# Altium PCB PCB1.PcbDoc
Units mil, origin at the board's own origin, x right, y up, seen from the top; angles counter-clockwise.
Board outline 6000 x 4000 mil, 2 copper layers (Top Layer, Bottom Layer); 62 components, 88 nets, 368 pads, 55 vias.
Unrouted connection lines stored in the file: 5.
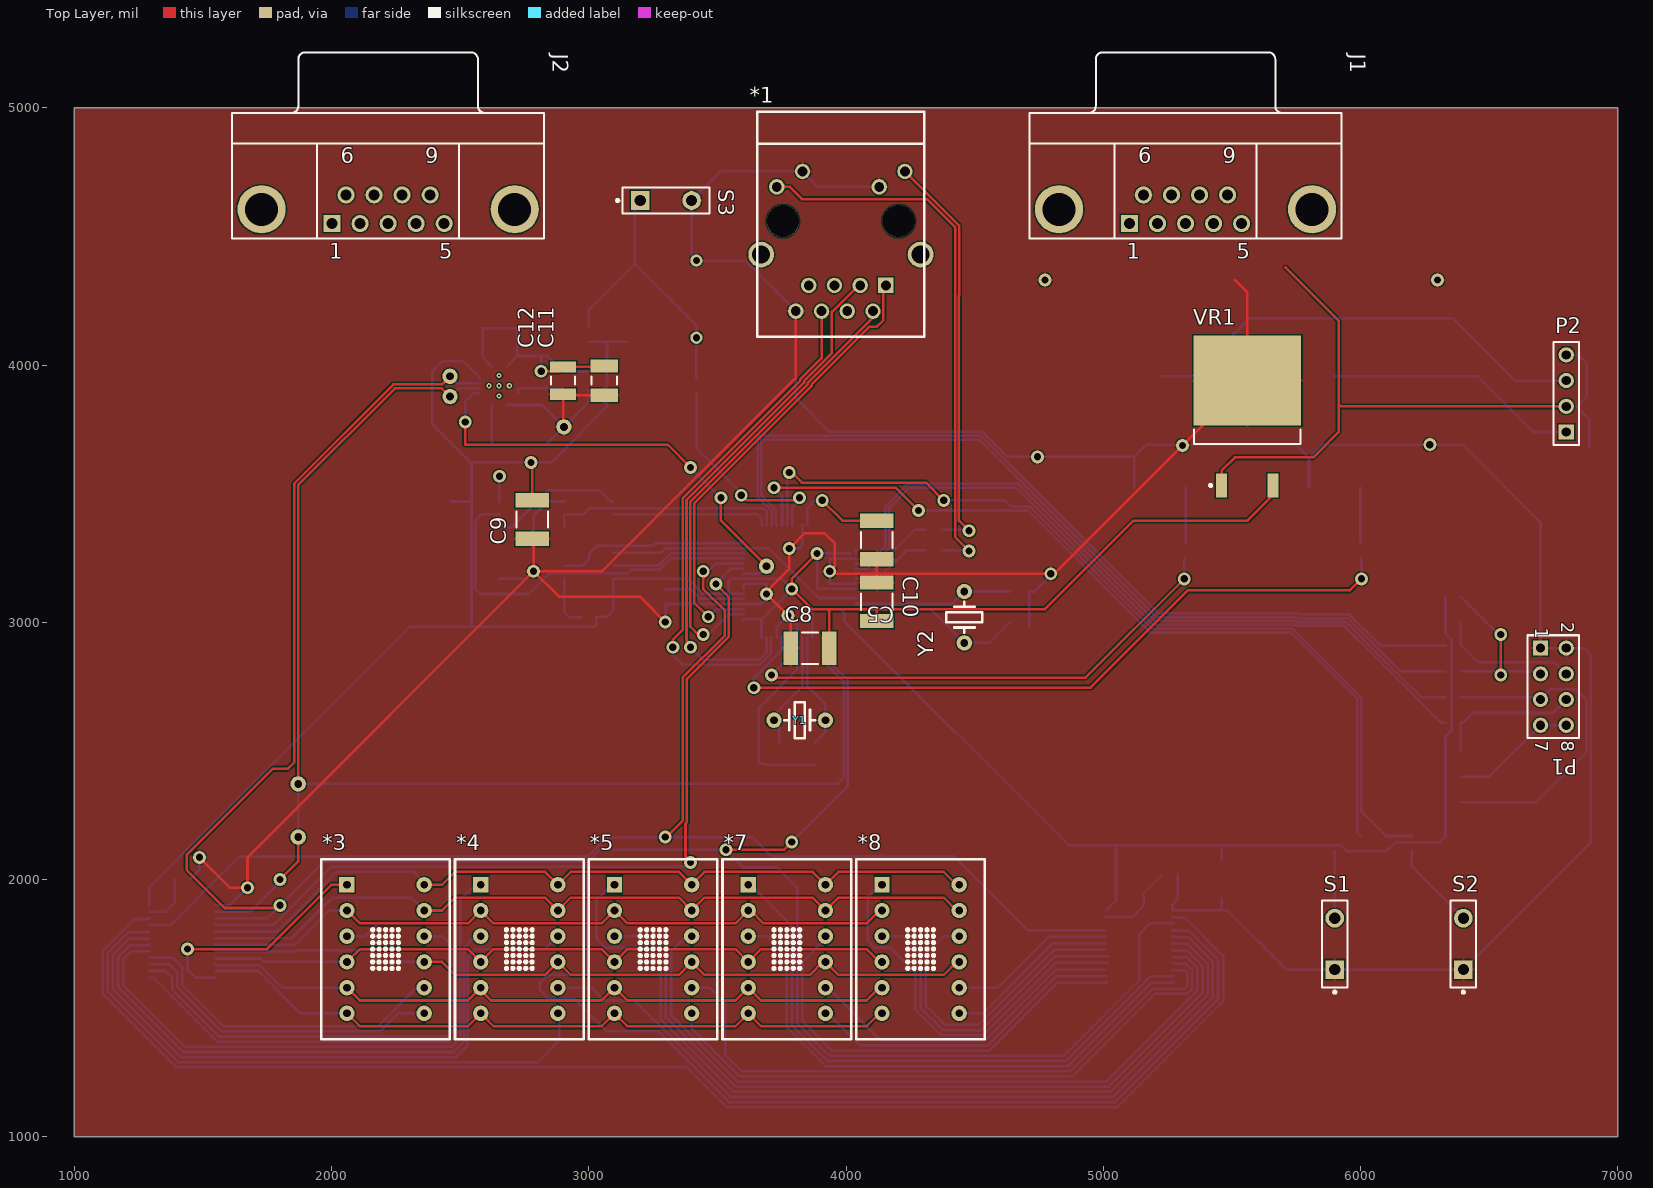
[diagram p0: Top Layer view]
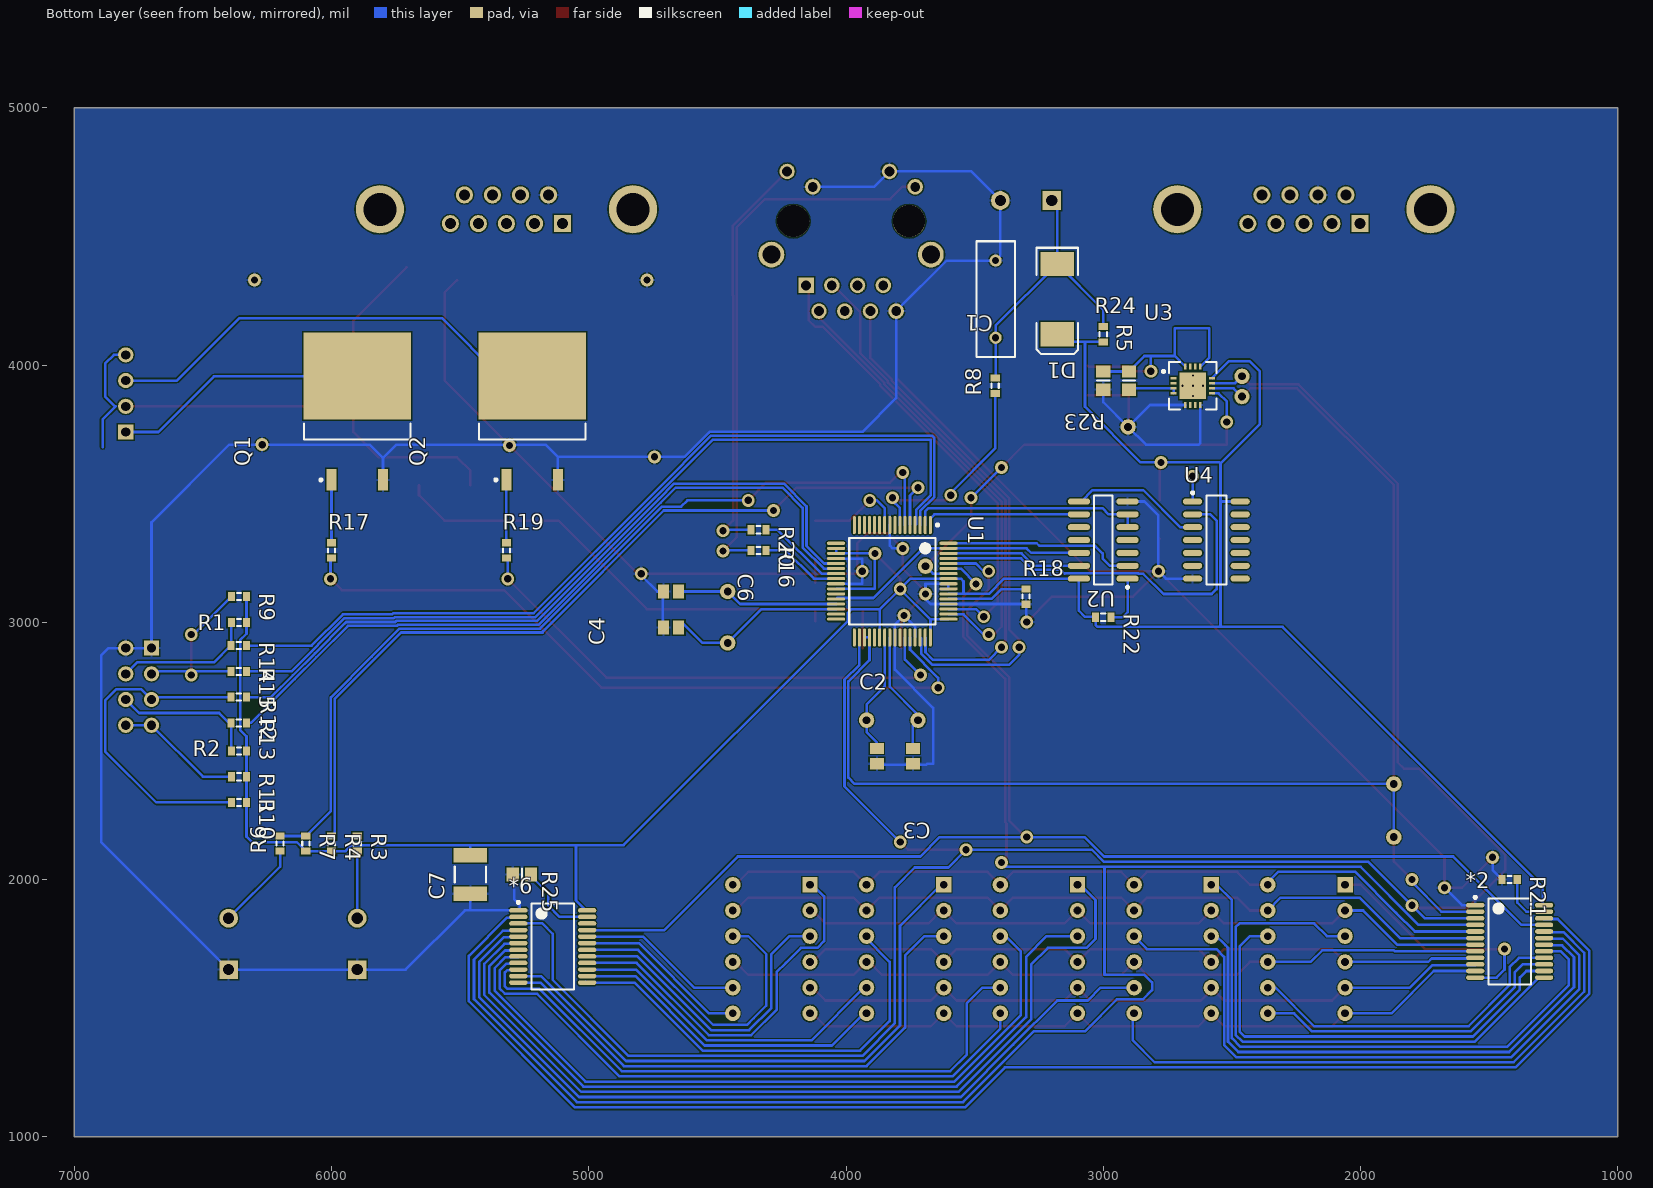
[diagram p1: Bottom Layer view, seen from below]

## Layer stack, top to bottom
Top Layer: signal copper 1.4
Dielectric: dielectric 12.6, FR-4, Dk 4.8
Bottom Layer: signal copper 1.4

## Board outline
1000,1000 7000,1000 7000,5000 1000,5000

## Design rules (kind name [scope] priority, off if disabled: settings)
Clearance [All] p1: gap=5
PolygonConnect [All] p1: connectstyle=Relief reliefconductorwidth=10 reliefentries=4 polygonreliefangle="90 Angle"
RoomDefinition Sheet1 [InComponentClass('Sheet1')] p1: confinementstyle=ConfineOut formatcopy=TRUE lockcomponents=FALSE outline 1003.94,984.25 541.34,984.25 541.34,1299.21 1003.94,1299.21
RoutingVias [All] p1: holewidth=28 width=50 viastyle="Through Hole" minholewidth=28 minwidth=50 maxholewidth=28 maxwidth=50
SilkscreenOverComponentPads [All] p1: minsilkscreentomaskgap=10
SolderMaskExpansion [All] p1: expansion=4
Width [All] p1: maxlimit=10 minlimit=10 preferedwidth=10
27 further rules are at their usual default settings.

## Components (designator, comment, footprint, x,y, rotation, side; value= is the part's Value field where it differs from the comment)
*1 "Component_1" EthernetCON 3980,4560 r90 top
*2 "STP16C596" SSOP-SS24_L 1420,1760 r180 bottom
*3 "BL-M07A571" "LED matrix 7x5" 2060,1980 r0 top
*4 "BL-M07A571" "LED matrix 7x5" 2580,1980 r0 top
*5 "BL-M07A571" "LED matrix 7x5" 3100,1980 r0 top
*6 "STP16C596" SSOP-SS24_L 5140,1740 r180 bottom
*7 "BL-M07A571" "LED matrix 7x5" 3620,1980 r0 top
*8 "BL-M07A571" "LED matrix 7x5" 4140,1980 r0 top
C1 "Cap" RAD-0.3 3418.35,4256.61 r270 bottom
C2 "Cap" CAPC2012L 3880,2480 r90 bottom
C3 "Cap" CAPC2012L 3740,2480 r270 bottom
C4 "Cap" CAPC2012L 4680,2980 r0 bottom
C5 "Cap" CAPC4532L 4120,3320 r270 top
C6 "Cap" CAPC2012L 4680,3120 r180 bottom
C7 "Cap" CAPC4532L 5460,2020 r90 bottom
C8 "Cap" CAPC4532L 3860,2900 r0 top
C9 "Cap" CAPC4532L 2780,3400 r90 top
C10 "Cap" CAPC4532L 4120,3080 r270 top
C11 "Cap" CAPC3225N 3060,3940 r90 top
C12 "Cap" CAPC3225L 2900,3940 r90 top
D1 "Diode" DSO-C2/X3.3 3178.35,4256.61 r270 bottom
J1 "D Connector 9" DSUB1.385-2H9 5320,4980 r0 top
J2 "D Connector 9" DSUB1.385-2H9 2220,4980 r0 top
P1 "Header 4X2" HDR2X4 6700,2900 r270 top
P2 "Header 4" HDR1X4 6800,3740 r90 top
Q1 "IRF630S" TO254P1510-3_4L 5900,3820 r90 bottom
Q2 "IRF630S" TO254P1510-3_4L 5220,3820 r90 bottom
R1 "Res3" RESC1608L 6360,3000 r180 bottom
R2 "Res3" RESC1608L 6360,2500 r180 bottom
R3 "Res3" RESC1608L 5900,2140 r270 bottom
R4 "Res3" RESC1608L 6000,2140 r270 bottom
R5 "Res3" RESC1608L 3000,4120 r270 bottom
R6 "Res3" RESC1608L 6200,2140 r90 bottom
R7 "Res3" RESC1608L 6100,2140 r270 bottom
R8 "Res3" RESC1608L 3420,3920 r90 bottom
R9 "Res3" RESC1608L 6360,3100 r180 bottom
R10 "Res3" RESC1608L 6360,2300 r180 bottom
R11 "Res3" RESC1608L 6360,2400 r180 bottom
R12 "Res3" RESC1608L 6360.79,2709.45 r180 bottom
R13 "Res3" RESC1608L 6360.79,2609.45 r180 bottom
R14 "Res3" RESC1608L 6360.79,2909.45 r180 bottom
R15 "Res3" RESC1608L 6360.79,2809.45 r180 bottom
R16 "Res3" RESC1608L 4340,3280 r180 bottom
R17 "Res3" RESC1608L 6000,3280 r90 bottom
R18 "Res3" RESC1608L 3300,3100 r90 bottom
R19 "Res3" RESC1608L 5320,3280 r90 bottom
R20 "Res3" RESC1608L 4340,3360 r180 bottom
R21 "Res3" RESC1608L 1420,2000 r180 bottom
R22 "Res3" RESC1608L 3000,3020 r180 bottom
R23 "Res2" RESC2012N 2900,3940 r270 bottom
R24 "Res2" RESC2012N 3000,3940 r90 bottom
R25 "Res3" RESC2012N 5260,2020 r180 bottom
S1 "Diafragm" SPST-2 5900,1750 r90 top
S2 "Filter" SPST-2 6400,1750 r90 top
S3 "SW-PB" SPST-2 3300,4640 r0 top
U1 "PIC18F67J60-I/PT" TQFP-PT64_N 3820,3160 r270 bottom
U2 "SN74S197D" D014_N 3000,3320 r0 bottom
U3 "LMH6518SQ" SQA16A 2651.61,3919.92 r180 bottom
U4 "SN54HC132DR" D014_L 2560,3320 r180 bottom
VR1 "Volt Reg" TO254P1510-3_4N 5560,3800 r90 top
Y1 "XTAL" Quartz 3720,2620 r0 top
Y2 "Z" Quartz 4460,2920 r90 top

## Footprints (in the part's own frame and the unit in brackets; to place one, negate y for a bottom-side part, rotate by r counter-clockwise, add the part's x,y. Pads: shape width x height; smd on the part's side, far side on the other; paste and mask are expansions set on the pad)
CAPC2012L [mm] "Chip Capacitor, Body 2.0x1.3mm, IPC High Density"
  rect 1.1x1.4 smd: 1(-0.75,0) 2(0.75,0)
  body extent -1.1,-0.72 1.1,0.72, height 1.4
CAPC3225L [mm] "Chip Capacitor, Body 3.2x2.5mm, IPC High Density"
  rect 1.1x2.6 smd: 1(-1.35,0) 2(1.35,0)
  silkscreen extent -0.4,-1.2 0.4,1.2, body extent -1.7,-1.35 1.7,1.35, height 1.5
CAPC3225N [mm] "Chip Capacitor, Body 3.2x2.5mm, IPC Medium Density"
  rect 1.3x2.7 smd: 1(-1.45,0) 2(1.45,0)
  silkscreen extent -0.4,-1.25 0.4,1.25, body extent -1.7,-1.35 1.7,1.35, height 1.5
CAPC4532L [mm] "Chip Capacitor, Body 4.5x3.2mm, IPC High Density"
  rect 1.4x3.3 smd: 1(-1.9,0) 2(1.9,0)
  silkscreen extent -0.8,-1.55 0.8,1.55, body extent -2.4,-1.7 2.4,1.7, height 1.4
D014_L [mm] "SOIC, 14-Leads, Body 8.7x3.9mm, Pitch 1.27mm, IPC High Density"
  oval 1.9x0.6 smd: 1(-2.35,3.81) 2(-2.35,2.54) 3(-2.35,1.27) 4(-2.35,0) 5(-2.35,-1.27) 6(-2.35,-2.54) 7(-2.35,-3.81) 8(2.35,-3.81) 9(2.35,-2.54) 10(2.35,-1.27) 11(2.35,0) 12(2.35,1.27) 13(2.35,2.54) 14(2.35,3.81)
  silkscreen extent -2.48,-4.4 1,4.78, body extent -2,-4.38 2,4.38, height 1.75
D014_N [mm] "SOIC, 14-Leads, Body 8.7x3.9mm, Pitch 1.27mm, IPC Medium Density"
  oval 2.2x0.6 smd: 1(-2.4,3.81) 2(-2.4,2.54) 3(-2.4,1.27) 4(-2.4,0) 5(-2.4,-1.27) 6(-2.4,-2.54) 7(-2.4,-3.81) 8(2.4,-3.81) 9(2.4,-2.54) 10(2.4,-1.27) 11(2.4,0) 12(2.4,1.27) 13(2.4,2.54) 14(2.4,3.81)
  silkscreen extent -2.52,-4.4 0.9,4.78, body extent -2,-4.38 2,4.38, height 1.75
DSO-C2/X3.3 [mm] "DO-214-AB/SMC; 2 C-Bend Leads; Body 7.9 x 5.9 mm, inc. leads (LxW)"
  rect 2.4x3.3 smd: 1(-3.475,0) 2(3.475,0)
  silkscreen extent -5.07,-2.05 5.43,2.05
DSUB1.385-2H9 [mm] "Connector; D Subminiature; 9 Position; Right Angle; Pitch 1.385 mm"
  rect 1.69x1.69 hole 1.09: 1(-5.54,-10.92)
  round 1.69 hole 1.09: 2(-2.77,-10.92) 3(0,-10.92) 4(2.77,-10.92) 5(5.54,-10.92) 6(-4.155,-8.08) 7(-1.385,-8.08) 8(1.385,-8.08) 9(4.155,-8.08)
  round 4.76 hole 3.26: 10(-12.495,-9.5) 11(12.495,-9.5)
  silkscreen extent -15.4,-12.4 15.4,6
EthernetCON [mil] "Ethernet connector w/two LEDs"
  rect 60x60 hole 38: 1(-250,-175)
  round 60 hole 38: 2(-350,-125) 3(-250,-75) 4(-350,-25) 5(-250,25) 6(-350,75) 7(-250,125) 8(-350,175) 9(193,-249) 10(133,-149) 11(193,149) 12(133,249)
  round 100 hole 70: 13(-130,-310) 14(-130,310)
  round 125 hole 125 unplated: 15(0,-225) 16(0,225)
  silkscreen extent -450,-325 425,325, body extent -450,-325 425,325, height 550
HDR1X4 [mm] "Connector; Header; 4 Position"
  rect 1.5x1.5 hole 0.9: 1(0,0)
  round 1.5 hole 0.9: 2(2.54,0) 3(5.08,0) 4(7.62,0)
  silkscreen extent -1.27,-1.27 8.89,1.27
HDR2X4 [mm] "Connector; Header; 4x2 Position"
  rect 1.5x1.5 hole 0.9: 1(0,0)
  round 1.5 hole 0.9: 2(0,2.54) 3(2.54,0) 4(2.54,2.54) 5(5.08,0) 6(5.08,2.54) 7(7.62,0) 8(7.62,2.54)
  silkscreen extent -1.27,-1.27 8.89,3.81
"LED matrix 7x5" [mil] "LED matrix 7x5"
  rect 60x60 hole 30: 1(0,0)
  round 60 hole 30: 2(0,-100) 3(0,-200) 4(0,-300) 5(0,-400) 6(0,-500) 7(300,-500) 8(300,-400) 9(300,-300) 10(300,-200) 11(300,-100) 12(300,0)
  silkscreen extent -100,-600 400,100, body extent -102,-600 400,105, height 250
Quartz [mil]
  round 60 hole 30: 1(0,0) 2(200,0)
  silkscreen extent 40,-70 160,70, body extent -100,-100 300,100, height 90
RAD-0.3 [mm] "Radial Cap, Thru-Hole; 2 Leads; 0.3 in Pin Spacing"
  round 1.2 hole 0.7: 1(-3.81,0) 2(3.81,0)
  silkscreen extent -5.71,-1.91 5.71,1.91
RESC1608L [mm] "Chip Resistor, Body 1.6x0.8mm, IPC High Density"
  rect 0.7x0.9 smd: 1(-0.75,0) 2(0.75,0)
  silkscreen extent -0.2,-0.35 0.2,0.35, body extent -0.85,-0.48 0.85,0.48, height 0.9
RESC2012N [mm] "Chip Resistor, Body 2.0x1.2mm, IPC Medium Density"
  rect 1.2x1.4 smd: 1(-0.9,0) 2(0.9,0)
  silkscreen extent 0,-0.6 0,0.6, body extent -1.07,-0.7 1.07,0.7, height 0.7
SPST-2 [mm] "Circuit Breaker; 2 Leads"
  rect 1.85x1.85 hole 1.1: 1(-2.54,0)
  round 1.85 hole 1.1: 2(2.54,0)
  silkscreen extent -4.89,-1.27 4.28,1.27
SQA16A [mm] "QFN, 16-Leads, Body 4x4mm, Pitch 0.5mm, NSC Recommended"
  rect 0.6x0.25 smd paste-0.125 mask+0.051: 1(-1.9,0.75) 2(-1.9,0.25) 3(-1.9,-0.25) 4(-1.9,-0.75) 9(1.9,-0.75) 10(1.9,-0.25) 11(1.9,0.25) 12(1.9,0.75)
  rect 0.25x0.6 smd paste-0.125 mask+0.051: 5(-0.75,-1.9) 6(-0.25,-1.9) 7(0.25,-1.9) 8(0.75,-1.9) 13(0.75,1.9) 14(0.25,1.9) 15(-0.25,1.9) 16(-0.75,1.9)
  rect 2.6x2.6 smd paste-1.3 mask+0.051: 17(0,0)
  silkscreen extent -3.03,-2.35 2.35,2.35, body extent -2.05,-2.05 2.05,2.05, height 0.8
SSOP-SS24_L [mm] "SOP, 24-Leads, Body 8.2x5.3mm, Pitch 0.65mm, IPC High Density"
  oval 1.8x0.45 smd: 1(-3.4,3.575) 2(-3.4,2.925) 3(-3.4,2.275) 4(-3.4,1.625) 5(-3.4,0.975) 6(-3.4,0.325) 7(-3.4,-0.325) 8(-3.4,-0.975) 9(-3.4,-1.625) 10(-3.4,-2.275) 11(-3.4,-2.925) 12(-3.4,-3.575) 13(3.4,-3.575) 14(3.4,-2.925) 15(3.4,-2.275) 16(3.4,-1.625) 17(3.4,-0.975) 18(3.4,-0.325) 19(3.4,0.325) 20(3.4,0.975) 21(3.4,1.625) 22(3.4,2.275) 23(3.4,2.925) 24(3.4,3.575)
  silkscreen extent -3.52,-4.25 2.1,4.47, body extent -2.7,-4.25 2.7,4.25, height 2
TO254P1510-3_4L [mm] "D2-PAK, 4-Leads, Body 8.8x10.4mm, Pitch 2.54mm, Lead Span 15.1mm, IPC High Density"
  rect 2.1x1 smd: 1(-6.75,2.54) 3(-6.75,-2.54)
  rect 8.6x10.6 smd: 2(3.5,0)
  silkscreen extent -6.87,-5.25 -1.2,5.25, body extent -2.75,-5.28 6.25,5.28, height 4.69
TO254P1510-3_4N [mm] "D2-PAK, 4-Leads, Body 8.8x10.4mm, Pitch 2.54mm, Lead Span 15.1mm, IPC Medium Density"
  rect 2.4x1.05 smd: 1(-6.8,2.54) 3(-6.8,-2.54)
  rect 8.9x10.65 smd: 2(3.55,0)
  silkscreen extent -6.92,-5.25 -1.3,5.25, body extent -2.7,-5.28 6.3,5.28, height 4.69
TQFP-PT64_N [mm] "Thin QFP, 64-Leads, Body 10x10mm, Pitch 0.5mm, IPC Medium Density"
  oval 1.8x0.3 smd: 1(-5.55,3.75) 2(-5.55,3.25) 3(-5.55,2.75) 4(-5.55,2.25) 5(-5.55,1.75) 6(-5.55,1.25) 7(-5.55,0.75) 8(-5.55,0.25) 9(-5.55,-0.25) 10(-5.55,-0.75) 11(-5.55,-1.25) 12(-5.55,-1.75) 13(-5.55,-2.25) 14(-5.55,-2.75) 15(-5.55,-3.25) 16(-5.55,-3.75) 33(5.55,-3.75) 34(5.55,-3.25) 35(5.55,-2.75) 36(5.55,-2.25) 37(5.55,-1.75) 38(5.55,-1.25) 39(5.55,-0.75) 40(5.55,-0.25) 41(5.55,0.25) 42(5.55,0.75) 43(5.55,1.25) 44(5.55,1.75) 45(5.55,2.25) 46(5.55,2.75) 47(5.55,3.25) 48(5.55,3.75)
  oval 0.3x1.8 smd: 17(-3.75,-5.55) 18(-3.25,-5.55) 19(-2.75,-5.55) 20(-2.25,-5.55) 21(-1.75,-5.55) 22(-1.25,-5.55) 23(-0.75,-5.55) 24(-0.25,-5.55) 25(0.25,-5.55) 26(0.75,-5.55) 27(1.25,-5.55) 28(1.75,-5.55) 29(2.25,-5.55) 30(2.75,-5.55) 31(3.25,-5.55) 32(3.75,-5.55) 49(3.75,5.55) 50(3.25,5.55) 51(2.75,5.55) 52(2.25,5.55) 53(1.75,5.55) 54(1.25,5.55) 55(0.75,5.55) 56(0.25,5.55) 57(-0.25,5.55) 58(-0.75,5.55) 59(-1.25,5.55) 60(-1.75,5.55) 61(-2.25,5.55) 62(-2.75,5.55) 63(-3.25,5.55) 64(-3.75,5.55)
  silkscreen extent -5.67,-4.25 4.25,4.57, body extent -5,-5 5,5, height 1.2

## Part data
C1 C2 C3 C4 C5 C6 C7 C8 C9 C10 C11 C12: "Capacitor"
D1: "Default Diode"
J1 J2: "Receptacle Assembly, 9 Position, Right Angle"
P1: "Header, 4-Pin, Dual row"
P2: "Header, 4-Pin"
Q1 Q2: "HEXFET N-Channel Power MOSFET"
R1 R2 R3 R4 R5 R6 R7 R8 R9 R10 R11 R12 R13 R14 R15 R16 R17 R18 R19 R20 R21 R22 R23 R24: "Resistor"
R25: library part Res2, "Resistor"
S1 S2: library part SW-PB, "Switch"
S3: "Swich"
U1: "High Performance, 1-Mbit Flash Microcontroller with Ethernet, 128K Flash, 64-Pin TQFP, Industrial Temperature Range"
U2: "100-MHz Presettable Decade or Binary Counter / Latch"
U3: "900 MHz, Digitally Controlled, Variable Gain Amplifier"
U4: library part SN54S132W, "Quadruple 2-Input Positive-NAND Schmitt Trigger"
VR1: "Voltage Regulator"
Y1: "Crystal Oscillator"
Y2: library part XTAL, "32768 kHz"

## Free pads (board coordinates)
  round 60 hole 30: 3(1870.08,2372.05) 4(2903.54,3759.84) 5(2460.63,3956.69) 6(2460.63,3877.95) 7(3690.94,3218.5) 16(1870.08,2165.35)

## Via types
v1: diameter 50, hole 28, Top Layer to Bottom Layer, 50 vias
v2: diameter 19.68, hole 7.87, Top Layer to Bottom Layer, tented top, 5 vias

## Nets (pads, with @x,y where several pads share a name; then routed paths per layer and width w, separated by ;. In a path a pad name is that pad's centre, name@x,y a point inside that pad or via, vN(x,y) a via of type N, cw(c..) or ccw(c..) an arc to the next point about the centre after c; other vN are vias at no path point)
+5: J1.8 P2.2 P2.4 R23.2 U3.3 U3.4 VR1.1 | length 2842.7
  Top Layer w10: VR1.1 5460,3589.92 5511.81,3641.73 5816.93,3641.73 5915.35,3740.16 5915.35,3848.43 ; 5708.66,4379.92 5915.35,4173.23 5915.35,3848.43 ; P2.2 5923.78,3840 5915.35,3848.43
  Bottom Layer w10: U3.4 U3.3 2894.49,3910.08 R23.2 ; P2.4 6845.83,4040 6879.92,4005.91 6879.92,3877.95 6841.97,3840 6839.13,3840 6889.76,3789.37 6889.76,3681.1
GND: *1.8 *1.10 *1.11 *2.1 *6.1 C1.1 C2.1 C3.2 C4.2 C5.2 C6.1 C7.1 C8.1 C9.1 C10.1 C11.1 C12.1 J1.6 J2.7 P1.1 P1.2 pad.4 Q1.3 Q2.3 R18.1 R21.1 R24.1 R25.1 S1.1 S2.1 S3.2 U1.9 U1.20 U1.25 U1.41 U1.45 U1.52 U1.55 U1.56 U2.7 U3.5 U3.8 U4.7 VR1.2 | length 20605.9
  Top Layer w10: v1(1486.22,2086.61) 1604.33,1968.5 v1(1673.23,1968.5) 1673.23,2086.61 v1(2785.43,3198.82) ; C9.1 2785.43,3319.76 v1(2785.43,3198.82) ; pad.4 2900,3763.39 C12.1 2903.94,3882.91 C11.1 ; v1(3297.24,3001.97) 3198.82,3100.39 2883.86,3100.39 v1(2785.43,3198.82) ; v1@3774.61,3036.42 v1(3774.61,3026.57) ; v1@3779.53,3307.09 v1(3779.53,3287.4) ; C8.1 3785.2,3015.98 v1(3774.61,3026.57) ; *1.8 3805,3952.64 3051.18,3198.82 v1(2785.43,3198.82) ; C10.1 4120,3188.98 ; 4120,3192.99 C5.2 4120,3188.98 ; 4154.8,3190.24 4153.54,3188.98 ; 5511.81,4330.71 5560,4282.52 VR1.2 v1(5308.14,3687.91) 4809.21,3188.98 v1(4795.98,3188.98) 4153.54,3188.98 ; v1(3774.61,3026.57) v1(3690.94,3110.24) 3690.94,3120.08 3779.53,3208.66 v1(3779.53,3287.4) ; v1(3779.53,3287.4) 3838.58,3346.46 3917.32,3346.46 3956.69,3307.09 3956.69,3218.5 v1(3937.01,3198.82) 3946.85,3188.98 4120,3188.98 ; 4120,3188.98 4153.54,3188.98
  Bottom Layer w10: R21.1@1449.69,2000 R21.1 1486.22,2036.69 v1(1486.22,2086.61) ; *2.1@1548.94,1900.75 1605.47,1900.75 v1(1673.23,1968.5) ; U3.8 2622.09,3696.81 2627.95,3690.94 2834.65,3690.94 pad.4 ; U4.7 2756.61,3170 v1(2785.43,3198.82) 2785.43,3415.35 2840.08,3470 U2.7 ; U3.5 2818.27,3845.12 pad.4 ; R24.1 3000,3856.3 pad.4 ; v1(3297.24,3001.97) 3300,3004.72 R18.1 3300.95,3071.42 U1.52 3670.71,3071.42 3690.94,3091.65 v1(3690.94,3110.24) 3690.94,3149.61 3602.05,3149.61 3602.05,3131.02 U1.55 ; U1.45 3730.32,2942.6 3730.32,2982.28 v1(3774.61,3026.57) 3810.16,2991.02 U1.41 3810.16,2816.06 3661.42,2667.32 3661.42,2450.79 3683.94,2450.79 3687.87,2446.85 3740,2446.85 C2.1@3880,2446.85 ; v1(3779.53,3287.4) 3818.9,3287.4 3829.84,3298.35 U1.9 ; U1.25 3937.01,3150.16 v1(3937.01,3198.82) 3937.01,3247.48 4037.4,3247.48 U1.20 ; *1.10 3891,4693 *1.11 3513,4753 S3.2 3400,4424.96 C1.1 3608.39,4406.61 *1.8 3805,3872.17 3936.54,3740.63 4530.14,3740.63 4627.15,3643.62 v1(4744.09,3643.62) 5120,3643.62 ; C4.2@4713.15,2980 4713.15,3120 4733.15,3120 v1@4795.98,3182.83 ; Q2.3@5120,3523.46 Q2.3 5120,3643.62 ; R25.1@5289.53,2020 5289.53,1923.39 5268.94,1902.8 5268.94,1880.75 5481.46,1880.75 5712.2,1650 S1.1 S2.1 6895.39,2145.39 6895.39,2871.14 6866.54,2900 P1.2 P1.1 6700,3388.58 6397.64,3690.94 v1(6269.69,3690.94) 5851.97,3690.94 5800,3638.98 ; 5460,1883.35 C7.1@5460,1925.2 ; Q1.3@5800,3523.46 Q1.3 5800,3638.98 ; 5120,3643.62 5167.32,3690.94 5748.03,3690.94 5800,3638.98
  other v1: 4773.62,4330.71 6299.21,4330.71
Net*1_1: *1.1 U1.51 | length 1786.3
  Top Layer w10: v1(3464.57,3021.65) 3444.57,3041.65 3409.88,3076.34 3409.88,3184.32 3409.88,3462.82 3867.07,3920.01 3867.07,3926.13 4090.47,4149.53 4120,4149.53 4145,4174.53 4145,4300 *1.1
  Bottom Layer w10: v1(3464.57,3021.65) 3494.65,3051.73 U1.51
Net*1_2: *1.2 U1.50 | length 1774.2
  Top Layer w10: v1(3444.88,2952.76) 3425.2,2952.76 3394.88,2983.07 3394.88,3070.13 3394.88,3178.11 3394.88,3469.04 3852.07,3926.23 3852.07,3932.34 4105,4185.27 *1.2
  Bottom Layer w10: v1(3444.88,2952.76) 3464.57,2952.76 3543.31,3031.5 3602.05,3031.5 U1.50
Net*1_3: *1.3 U1.47 | length 2107.6
  Top Layer w10: v1(3395.67,2903.54) 3410.67,2918.54 3390.04,2918.54 3385.35,2923.23 3379.88,2928.7 3379.88,2976.86 3379.88,3063.91 3379.88,3171.9 3379.88,3475.25 3837.07,3932.44 3837.07,3938.55 3945,4046.48 3945,4206.57 4048.43,4310 *1.3
  Bottom Layer w10: v1(3395.67,2903.54) 3444.88,2854.33 3452.91,2854.33 3453.7,2855.12 3495.12,2855.12 3495.91,2854.33 3661.42,2854.33 3690.94,2883.86 3690.94,2940.39 U1.47
Net*1_6: *1.6 U1.46 | length 2055
  Top Layer w10: v1(3326.77,2903.54) 3326.77,2933.07 3364.88,2971.18 3364.88,3057.7 3364.88,3165.68 3364.88,3481.46 3822.07,3938.65 3822.07,3944.77 3905,4027.69 *1.6
  Bottom Layer w10: v1(3326.77,2903.54) 3326.77,2874.02 3366.14,2834.65 3454.44,2834.65 3494.38,2834.65 3662.95,2834.65 3707.95,2879.65 3707.95,2937.72 U1.46
Net*1_9: *1.9 R20.1 | length 1610.7
  Top Layer w10: *1.9 4321.33,4660.67 4439.45,4542.55 4439.45,4360.71 4439.45,4269.54 4438.98,4269.07 4438.98,3395.67 v1(4478.35,3356.3)
  Bottom Layer w10: R20.1 4474.65,3360 v1(4478.35,3356.3)
Net*1_12: *1.12 R16.1 | length 2149.7
  Top Layer w10: *1.12 3781.41,4693 3828.74,4645.67 4315.12,4645.67 4424.45,4536.34 4424.45,4371.32 4424.45,4275.76 4423.98,4275.28 4423.98,3331.93 v1(4478.35,3277.56)
  Bottom Layer w10: R16.1 4475.91,3280 v1(4478.35,3277.56)
Net*2_2: *2.2 pad.3 pad.6 pad.16 U1.35 U1.36 U3.10 | length 5506
  Top Layer w10: v1(1800,2000) 1870.08,2070.08 pad.16 ; pad.3 1870.08,3533.46 2246.69,3910.08 2428.5,3910.08 pad.6
  Bottom Layer w10: *2.2@1548.94,1875.16 1685.16,1875.16 1796.3,1986.3 1813.7,1986.3 v1(1800,2000) ; pad.16 1870.08,2362.2 1879.92,2372.05 3966.54,2372.05 3990.91,2396.42 3990.91,2770.91 3908.58,2853.23 U1.36 U1.35 ; pad.6 2492.76,3910.08 U3.10
Net*2_3: *2.3 *6.3 pad.5 U1.34 U3.11 | length 9041.4
  Top Layer w10: v1(1800,1900) 1800,1898.43 1791.34,1889.76 1584.65,1889.76 1437.01,2037.4 1437.01,2096.46 1771.65,2431.1 1830.71,2431.1 1855.08,2455.47 1855.08,3539.68 2240.48,3925.08 2431.1,3925.08 2431.1,3927.17 pad.5 ; v1(3533.46,2116.14) 3759.84,2116.14 v1(3789.37,2145.67)
  Bottom Layer w10: *2.3@1548.94,1849.57 1749.57,1849.57 1789.37,1889.37 1800,1878.74 v1(1800,1900) 1801.02,1901.02 1811.02,1901.02 1811.02,1911.02 1970,2070 2998.28,2070 3044.43,2116.14 v1(3533.46,2116.14) 3602.36,2047.24 3732.76,2047.24 3810,1970 3810,1441.72 3936.72,1315 4845,1315 5140,1610 5140,1789.14 5180.43,1829.57 *6.3@5268.94,1829.57 ; pad.5 2487.56,3929.76 U3.11 ; v1(3789.37,2145.67) 4005.91,2362.2 4005.91,2777.12 3947.95,2835.07 U1.34 ; *6.3 *6.3@5274.29,1830
Net*2_4: *2.4 *6.4 U1.59 | length 7262.5
  Top Layer w10: v1(3395.67,2066.93) 3375.98,2086.61 3375.98,2218.2 3381.14,2223.35 3381.14,2780.75 3544.09,2943.7 3544.09,3099.61 v1(3494.09,3149.61)
  Bottom Layer w10: *2.4@1548.94,1823.98 1773.98,1823.98 2000,2050 2990,2050 3378.74,2050 v1(3395.67,2066.93) ; 2995,2045 2995,1630 2840,1630 2810,1600 2810,1570 2845,1535 2946.72,1535 3071.72,1410 3270.29,1410 3545.29,1135 5045.8,1135 5446.26,1535.46 5446.26,1688.64 5333.64,1801.26 *6.4@5273.86,1801.26 ; v1(3494.09,3149.61) 3553.7,3209.21 U1.59 ; *6.4@5268.94,1803.98 *6.4
Net*2_5: *2.5 *3.12 *4.12 *5.12 *7.12 *8.12 | length 3180.5
  Top Layer w10: *3.12 2430,1980 2480,2030 2830,2030 *4.12 2930,2030 3350,2030 *5.12 3450,2030 3870,2030 *7.12 3970,2030 4380,2030 *8.12@4430,1980
  Bottom Layer w10: *2.5@1548.94,1798.39 1788.39,1798.39 1861.02,1871.02 2020,2030 2040,2030 2074.85,2030 2320,2030 *3.12@2375,1975
Net*2_6: *2.6 *3.11 *4.11 *5.11 *7.11 *8.11 | length 3132.6
  Top Layer w10: *3.11 2430,1880 2480,1930 2680,1930 2830,1930 *4.11 2930,1930 3080,1930 3280,1930 3350,1930 *5.11 3450,1930 3870,1930 *7.11 3970,1930 4380,1930 *8.11@4430,1880
  Bottom Layer w10: *2.6@1548.94,1772.8 1845.93,1772.8 2003.14,1930 2310,1930 *3.11
Net*2_7: *2.7 *3.2 *4.2 *5.2 *7.2 *8.2 | length 2810.1
  Top Layer w10: *3.2@2075,1895 2075,1865 2110,1830 2530,1830 *4.2 2630,1830 3050,1830 *5.2 3150,1830 3570,1830 3619.45,1879.45 3630.55,1879.45 3680,1830 4080,1830 *8.2@4130,1880
  Bottom Layer w10: *2.7@1548.94,1747.21 1857.21,1747.21 1990,1880 *3.2
Net*2_8: *2.8 *3.9 *4.9 *5.9 *7.9 *8.9 | length 3170.9
  Top Layer w10: *3.9 2430,1680 2480,1630 ; 2580,1630 2480,1630 ; *8.9@4430,1680 4380,1630 3970,1630 3915,1685 3860,1630 3450,1630 *5.9 3350,1630 2930,1630 *4.9 2830,1630 2780,1630 2480,1630
  Bottom Layer w10: *2.8@1548.94,1721.61 1866.46,1721.61 1869.84,1725 2111.36,1725 2148.64,1725 2193.64,1680 *3.9
Net*2_9: *2.9 *3.4 *4.4 *5.4 *7.4 *8.4 | length 2756.3
  Top Layer w10: *3.4@2065,1675 2065,1685 2110,1730 2530,1730 *4.4 2630,1730 3040,1730 3050,1730 *5.4 3150,1730 3570,1730 *7.4 3670,1730 4080,1730 *8.4@4130,1680
  Bottom Layer w10: *2.9@1548.94,1696.02 1551.65,1693.31 1723.26,1693.31 1736.57,1680 *3.4
Net*2_10: *2.10 *3.5 *4.5 *5.5 *7.5 *8.5 | length 2790.1
  Top Layer w10: *3.5 2110,1530 2530,1530 *4.5 2580,1570 2620,1530 3050,1530 *5.5 3150,1530 3570,1530 *7.5 3670,1530 4080,1530 *8.5@4130,1580
  Bottom Layer w10: *2.10@1548.94,1670.43 1551.65,1667.72 1720.57,1667.72 1808.28,1580 *3.5
Net*2_11: *2.11 *3.6 *4.6 *5.6 *7.6 *8.6 | length 2815
  Top Layer w10: *3.6 2110,1430 2405,1430 2530,1430 *4.6 2590,1470 2630,1430 2731.25,1430 2855,1430 3050,1430 *5.6 3150,1430 3570,1430 *7.6 3670,1430 4080,1430 *8.6@4130,1480
  Bottom Layer w10: *2.11@1548.94,1644.84 1715.16,1644.84 1880,1480 *3.6
Net*2_12: *2.12 *3.1 | length 932.1
  Top Layer w10: v1(1440,1730) 1750,1730 2000,1980 2053.43,1980 2060,1973.43 *3.1@2063.14,1973.43
  Bottom Layer w10: v1(1440,1730) 1440,1650 1470.75,1619.25 1548.94,1619.25 *2.12@1549.69,1620
Net*2_13: *2.13 *3.3 | length 2178.5
  Bottom Layer w10: *2.13@1291.06,1619.25 1305.9,1619.25 1555.15,1370 2458.28,1370 2485,1396.72 2485,1554.79 2485,1605.21 2485,1672.07 2485,1748.64 2485,1815 2470,1830 2180,1830 2130,1780 *3.3
Net*2_14: *2.14 *3.10 | length 1776.6
  Bottom Layer w10: *2.14@1291.06,1644.84 1355.16,1644.84 1380,1620 1380,1573.43 1563.43,1390 2450,1390 2470,1410 2470,1548.58 2470,1611.42 2470,1678.28 2470,1740 2430,1780 *3.10
Net*2_15: *2.15 *3.7 | length 1239.9
  Bottom Layer w10: *2.15@1291.06,1670.43 1369.57,1670.43 1400,1640 1400,1581.72 1571.72,1410 2188.28,1410 2258.28,1480 *3.7
Net*2_16: *2.16 *3.8 | length 1302.3
  Bottom Layer w10: *2.16@1291.06,1696.02 1383.98,1696.02 1420,1660 1420,1590 1580,1430 2180,1430 2330,1580 *3.8 *3.8@2380,1580
Net*2_17: *2.17 *4.1 | length 2278.8
  Bottom Layer w10: *2.17@1291.06,1721.61 1221.61,1721.61 1190,1690 1190,1590 1430,1350 2466.57,1350 2500,1383.43 2500,1465.86 2500,1494.14 2500,1561.01 2500,1598.99 2500,1665.86 2500,1742.43 2500,1920 2560,1980 *4.1
Net*2_18: *2.18 *4.3 | length 2169.4
  Bottom Layer w10: *2.18@1291.06,1747.21 1288.35,1744.49 1216.2,1744.49 1170,1698.28 1170,1581.72 1421.72,1330 2474.85,1330 2515,1370.15 2515,1459.64 2515,1500.36 2515,1567.22 2515,1592.78 2515,1659.64 2515,1735 2525,1745 2565,1785 *4.3@2575,1785
Net*2_19: *2.19 *4.10 | length 2536.4
  Bottom Layer w10: *2.19@1291.06,1772.8 1288.35,1770.08 1213.51,1770.08 1150,1706.57 1150,1573.43 1413.43,1310 2483.14,1310 2530,1356.86 2530,1453.43 2530,1506.57 2530,1573.43 2530,1586.57 2530,1653.43 2530,1700 2560,1730 2570,1730 2830,1730 *4.10
Net*2_20: *2.20 *4.7 | length 2349.5
  Bottom Layer w10: *2.20@1291.06,1798.39 1288.35,1795.67 1210.82,1795.67 1130,1714.85 1130,1565.15 1405.15,1290 2800,1290 2885,1375 *4.7@2885,1475
Net*2_21: *2.21 *6.21 U1.60 | length 5354.8
  Top Layer w10: v1(3297.24,2165.35) 3301.93,2165.35 3366.14,2229.57 3366.14,2785.43 ; 3364.61,2785.43 3529.09,2949.91 3529.09,3045.71 3444.88,3129.92 3444.88,3170.39 3459.09,3184.61 v1(3444.88,3198.82)
  Bottom Layer w10: *2.21@1291.06,1823.98 1373.98,1823.98 1640,2090 2997.07,2090 3072.43,2165.35 v1(3297.24,2165.35) 3635.86,2165.35 3711.21,2090 4420,2090 4706.02,1803.98 *6.21 ; v1(3444.88,3198.82) 3464.57,3198.82 3494.65,3228.9 U1.60
Net*2_22: *2.22 *6.2 | length 5546.3
  Bottom Layer w10: *2.22@1291.06,1849.57 1288.35,1846.85 1233.71,1846.85 1110,1723.14 1110,1556.86 1396.86,1270 3382.01,1270 3537.01,1115 5054.09,1115 5466.26,1527.18 5466.26,1703.66 5317.47,1852.44 *6.2@5287.28,1852.44 ; *6.2@5268.94,1855.16 5271.65,1852.44 *6.2@5273.86,1852.44 ; *6.2 *6.2@5287.28,1855.16
Net*2_23: *2.23 R21.2 | length 203.6
  Bottom Layer w10: *2.23@1291.06,1875.16 1355.16,1875.16 1390.47,1910.47 R21.2
Net*4_8: *4.8 *6.5 | length 3215.7
  Bottom Layer w10: *4.8 3010,1580 3060,1530 3178.58,1530 3350,1358.58 3553.58,1155 5037.52,1155 5426.26,1543.74 5426.26,1680.35 5330.94,1775.67 *6.5@5277.28,1775.67 ; *6.5@5268.94,1778.39 *6.5@5271.65,1775.67 ; *6.5 *6.5@5277.28,1778.39
Net*5_1: *5.1 *6.6 | length 3436.5
  Bottom Layer w10: *5.1@3095,1985 3030,1920 3030,1770 3065,1735 3215,1735 3280,1670 3280,1456.86 3561.86,1175 5029.23,1175 5406.26,1552.03 5406.26,1672.07 5328.25,1750.08 *6.6@5287.28,1750.08 ; *6.6@5268.94,1752.8 5271.65,1750.08 *6.6@5273.86,1750.08 ; *6.6 *6.6@5287.28,1752.8
Net*5_3: *5.3 *6.7 | length 3063.4
  Bottom Layer w10: *5.3 3220,1780 3300,1700 3300,1465.15 3570.15,1195 5020.95,1195 5386.26,1560.31 5386.26,1663.78 5325.56,1724.49 *6.7@5273.86,1724.49 ; *6.7@5268.94,1727.2 *6.7
Net*5_7: *5.7 *6.9 | length 2382
  Bottom Layer w10: *5.7 3400,1421.72 3586.72,1235 4879.85,1235 5201.23,1556.38 5325.76,1556.38 5346.26,1576.88 5346.26,1647.22 5320.17,1673.31 *6.9@5273.86,1673.31 ; *6.9@5268.94,1676.02 *6.9
Net*5_8: *5.8 *6.10 | length 2429.5
  Bottom Layer w10: *5.8 3470,1580 3530,1520 3530,1320 3595,1255 4871.57,1255 5192.95,1576.38 5317.47,1576.38 5326.26,1585.16 5326.26,1638.93 5317.47,1647.72 *6.10@5273.86,1647.72 ; *6.10@5268.94,1650.43 *6.10
Net*5_10: *5.10 *6.8 | length 2853.4
  Bottom Layer w10: *5.10 3380,1780 3320,1720 3320,1473.43 3578.43,1215 5012.66,1215 5366.26,1568.6 5366.26,1655.5 5322.86,1698.9 *6.8@5273.86,1698.9 ; *6.8@5268.94,1701.61 *6.8
Net*6_11: *6.11 *7.1 | length 2290.7
  Bottom Layer w10: *7.1@3630,1980 3790,1820 3790,1433.43 3928.43,1295 4855,1295 5184.84,1624.84 5268.94,1624.84 *6.11
Net*6_12: *6.12 *7.3 | length 2152.3
  Bottom Layer w10: *7.3@3630,1780 3694.85,1780 3770,1704.85 3770,1425.15 3920.15,1275 4863.28,1275 5187.54,1599.25 *6.12@5268.94,1599.25 ; *6.12@5269.69,1600 *6.12@5268.94,1599.25 ; *6.12 *6.12@5268.94,1599.25
Net*6_13: *6.13 *7.10 | length 1712.3
  Bottom Layer w10: *7.10@3930,1780 3830,1680 3830,1450 3945,1335 4369.94,1335 4557.5,1335 4821.75,1599.25 5011.06,1599.25 *6.13@5011.06,1601.97
Net*6_14: *6.14 *7.7 | length 1244.6
  Bottom Layer w10: *7.7@3930,1480 4055,1355 4378.22,1355 4549.22,1355 4819.06,1624.84 *6.14@5011.06,1624.84
Net*6_15: *6.15 *7.8 | length 1275.1
  Bottom Layer w10: *7.8@3930,1580 4135,1375 4315,1375 4335,1375 4540.93,1375 4816.36,1650.43 *6.15
Net*6_16: *6.16 *8.1 | length 1526.3
  Bottom Layer w10: *8.1@4130,1980 4085,1935 4085,1761.36 4111.36,1735 4172.28,1735 4175,1735 4233.43,1676.57 4270,1640 4270,1493.43 4368.43,1395 4532.65,1395 4813.67,1676.02 *6.16@5020,1676.02
Net*6_17: *6.17 *8.3 | length 1281.9
  Bottom Layer w10: *8.3@4130,1780 4220,1780 4290,1710 4290,1501.72 4376.72,1415 4524.36,1415 4810.98,1701.61 *6.17@5020,1701.61
Net*6_18: *6.18 *8.10 | length 1197.2
  Bottom Layer w10: *8.10@4430,1780 4380,1780 4310,1710 4310,1510 4358.64,1461.36 4385,1435 4516.08,1435 4808.28,1727.21 *6.18
Net*6_19: *6.19 *8.7 | length 693
  Bottom Layer w10: *8.7@4430,1480 4532.79,1480 4805.59,1752.8 *6.19@5010,1752.8
Net*6_20: *6.20 *8.8 | length 663.2
  Bottom Layer w10: *8.8@4430,1580 4590,1580 4788.39,1778.39 *6.20@5011.06,1778.39
Net*6_23: *6.23 R25.2 | length 316.2
  Bottom Layer w10: *6.23 5011.06,1855.16 5113.03,1855.16 5157.48,1899.61 5157.48,1947.01 R25.2@5227.52,2017.05
NetC1_2: C1.2 D1.1 R5.1 R8.2 S3.1 | length 1117.3
  Bottom Layer w10: R5.1 3000,4215.08 D1.1 ; S3.1 3178.35,4618.35 D1.1 ; R8.2 3418.35,3951.18 C1.2 3418.35,4153.43 D1.1
NetC2_2: C2.2 U1.39 Y1.2 | length 454.1
  Bottom Layer w10: U1.39 3849.53,2750.47 3920,2680 3920,2573.15 3880,2533.15
NetC3_1: C3.1 U1.40 Y1.1 | length 462.1
  Bottom Layer w10: 3740,2533.15 3740,2600 Y1.1 3720,2640 3829.84,2749.84 U1.40
NetC4_1: C4.1 U1.30 Y2.1 | length 685.6
  Bottom Layer w10: U1.30 4328.27,3051.73 Y2.1 4557.87,2920 C4.1@4636.85,2998.98
NetC5_1: C5.1 U1.10 | length 381.1
  Top Layer w10: v1(3907.48,3474.41) 3986.22,3395.67 C5.1@4120,3395.67
  Bottom Layer w10: U1.10 3849.53,3443.78 3880.16,3474.41 v1(3907.48,3474.41)
NetC6_2: C6.2 U1.29 Y2.2 | length 618.5
  Bottom Layer w10: U1.29 4411.42,3071.42 Y2.2 C6.2@4636.85,3120
NetC11_2: C11.2 C12.2 R23.1 R24.2 U3.13 U3.16 | length 1077.6
  Top Layer w10: v1(2814.96,3976.38) 2883.23,3976.38 C12.2 3056.06,3993.15 C11.2
  Bottom Layer w10: U3.13 2588.58,4028.23 2588.58,4143.7 2721.85,4143.7 2721.85,4035.43 ; U3.16 2721.85,4035.43 ; v1(2814.96,3976.38) 2814.96,4035.43 ; R24.2 R23.1 2840,4035.43 2814.96,4035.43 ; 2721.85,4035.43 2814.96,4035.43
NetJ2_3: J2.3 U4.1 | length 104.9
  Bottom Layer w10: U4.1 v1(2652.52,3567.87) v1@2657.48,3572.83
NetP1_3: P1.3 R9.1 R15.1 | length 687.8
  Top Layer w10: v1(6545.28,2795.28) v1(6545.28,2952.76)
  Bottom Layer w10: R9.1 6536.77,2952.76 v1(6545.28,2952.76) ; R15.1 6690.55,2809.45 P1.3
NetP1_4: P1.4 R1.1 R14.1 | length 545.9
  Bottom Layer w10: R1.1 6390.31,2999.21 R14.1 6391.73,2909.45 6456.69,2844.49 6755.51,2844.49 P1.4
NetP1_5: P1.5 R10.1 R12.1 | length 1298.9
  Bottom Layer w10: R10.1 6681.45,2300 6880.39,2498.94 6880.39,2696.38 6837.24,2739.53 6739.53,2739.53 P1.5 6690.55,2709.45 R12.1
NetP1_6: P1.6 R2.1 R13.1 | length 562.5
  Bottom Layer w10: R2.1 6390.31,2500.79 R13.1 6398.82,2609.45 6437.01,2647.64 6747.64,2647.64 P1.6@6803.94,2703.94
NetP1_7: P1.7 P1.8 R11.1 | length 493.3
  Bottom Layer w10: R11.1 6500,2400 P1.7 P1.8
NetP2_1: P2.1 Q1.2 | length 989.7
  Bottom Layer w10: Q1.2@5900,3956.54 6456.85,3956.54 6673.39,3740 P2.1
NetP2_3: P2.3 Q2.2 | length 1774.5
  Bottom Layer w10: Q2.2@5220,3956.54 5344.33,3956.54 5570.87,4183.07 6358.27,4183.07 6601.34,3940 P2.3
NetQ1_1: Q1.1 R17.2 | length 213.9
  Bottom Layer w10: R17.2 Q1.1@6000,3523.46
NetQ2_1: Q2.1 R19.2 | length 213.9
  Bottom Layer w10: R19.2 Q2.1@5320,3523.46
NetR3_1: R3.1 R4.1 U1.5 | length 3305.9
  Top Layer w10: v1(3720.47,3523.62) 3759.84,3523.62 4192.91,3523.62 v1(4281.5,3435.04)
  Bottom Layer w10: v1(3720.47,3523.62) 3751.1,3492.99 3751.1,3455.83 U1.5 ; v1(4281.5,3435.04) 4634.49,3435.04 4708.45,3435.04 5178.21,2965.28 5178.21,2960.58 5729.42,2960.58 5987.82,2702.18 5987.82,2181.71 R4.1
NetR3_2: R3.2 S1.2 | length 260.5
  Bottom Layer w10: S1.2 R3.2
NetR6_1: R6.1 S2.2 | length 343.3
  Bottom Layer w10: R6.1 6200,2050 S2.2
NetR6_2: R6.2 R7.1 U1.6 | length 3486.3
  Top Layer w10: v1(3779.53,3582.68) 3779.53,3572.83 3789.37,3582.68 3828.74,3543.31 4311.02,3543.31 v1(4379.92,3474.41)
  Bottom Layer w10: U1.6 3770.79,3443.78 3770.79,3564.09 3779.53,3572.83 v1(3779.53,3582.68) ; v1(4379.92,3474.41) 4616.33,3474.41 4640.7,3450.04 4697.57,3450.04 4714.67,3450.04 5189.13,2975.58 5735.64,2975.58 5844.39,2866.83 6002.82,2708.39 6002.82,2266.71 R7.1 R6.2
NetR8_1: R8.1 U1.7 | length 856.3
  Top Layer w10: v1(3592.52,3494.09) 3612.2,3474.41 3818.9,3474.41 3828.74,3484.25 v1(3818.9,3484.25)
  Bottom Layer w10: R8.1 3420,3676.46 3592.52,3503.94 v1(3592.52,3494.09) ; U1.7 3790.47,3443.78 3821.1,3474.41 3828.74,3474.41 v1(3818.9,3484.25)
NetR12_2: R12.2 U1.21 | length 2854.7
  Bottom Layer w10: U1.21 4084.64,3228.9 4153.54,3297.8 4153.54,3451.1 4241.54,3539.09 4650.94,3539.09 4668.04,3539.09 4727.09,3480.04 5201.56,3005.58 5748.06,3005.58 5752.14,3001.5 5943.05,3001.5 5947.26,2997.28 6065.09,2879.45 6150.09,2794.45 6235.09,2709.45 R12.2
NetR13_2: R13.2 U1.22 | length 2891.8
  Bottom Layer w10: U1.22 4086.17,3209.21 4168.54,3291.59 4168.54,3444.88 4247.76,3524.09 4661.83,3524.09 4720.88,3465.04 5195.34,2990.58 5741.85,2990.58 5745.93,2986.5 5936.83,2986.5 6058.88,2864.45 6143.88,2779.45 6228.88,2694.45 6313.88,2609.45 R13.2
NetR14_2: R14.2 U1.3 | length 3378
  Bottom Layer w10: U1.3 3711.73,3432.41 3656.26,3487.88 3656.26,3716.84 3665.05,3725.63 4523.93,3725.63 4739.52,3510.04 5213.98,3035.58 5760.49,3035.58 5764.57,3031.5 5955.47,3031.5 6077.52,2909.45 R14.2
NetR15_2: R15.2 U1.4 | length 3390.3
  Bottom Layer w10: U1.4 3727.64,3382.28 3727.64,3414.62 3726.73,3415.53 3726.73,3438.62 3671.26,3494.09 3671.26,3710.63 4517.72,3710.63 4733.31,3495.04 5207.77,3020.58 5754.28,3020.58 5758.36,3016.5 5949.26,3016.5 6156.31,2809.45 R15.2
NetR16_2: R16.2 U1.24 | length 317.6
  Bottom Layer w10: U1.24 4124.57,3169.84 4234.72,3280 R16.2
NetR17_1: R17.1 U1.44 | length 2851.2
  Top Layer w10: v1(3641.73,2746.06) 4950.79,2746.06 5329.72,3125 5959.65,3125 v1(6003.94,3169.29)
  Bottom Layer w10: v1@3641.73,2755.91 3641.73,2784.32 3751.1,2893.7 U1.44 ; R17.1 6003.94,3246.53 v1(6003.94,3169.29)
NetR18_2: R18.2 U1.53 | length 317.4
  Bottom Layer w10: R18.2 3396.06,3129.53 3434.49,3091.1 U1.53
NetR19_1: R19.1 U1.43 | length 2007.9
  Top Layer w10: v1@3720.47,2785.43 4931.1,2785.43 v1(5314.96,3169.29)
  Bottom Layer w10: v1(3710.63,2795.28) 3770.79,2855.43 U1.43 ; v1(5314.96,3169.29) 5314.96,3245.43 R19.1
NetR20_2: R20.2 U1.23 | length 342.6
  Bottom Layer w10: U1.23 4095.04,3189.53 4265.51,3360 R20.2
NetR22_2: R22.2 U2.1 | length 205.6
  Bottom Layer w10: U2.1 2905.51,3039.37 2924.88,3020 R22.2@2972.44,3020
NetU1_1: U1.1 U2.9 | length 610.2
  Bottom Layer w10: U2.9 3194.17,3420 3656.77,3420 3672.36,3404.41 U1.1
NetU1_2: U1.2 U2.5 U2.6 | length 904.1
  Bottom Layer w10: U2.5 U2.6 2979.29,3420 3003.07,3443.78 3679.15,3443.78 3692.05,3430.88 U1.2
NetU1_28: U1.28 U1.63 U2.12 | length 1033
  Bottom Layer w10: U2.12 3279.84,3270 3297.8,3287.95 U1.63 3700.24,3287.95 3893.31,3094.88 4034.72,3094.88 U1.28
NetU1_58: pad.7 U1.58 U3.9 | length 1758
  Top Layer w10: v1(2519.68,3779.53) 2519.68,3690.94 3307.09,3690.94 v1(3395.67,3602.36) ; v1(3513.78,3484.25) 3513.78,3395.67 pad.7
  Bottom Layer w10: v1(2519.68,3779.53) 2519.68,3858.27 2551.81,3890.39 U3.9 ; v1(3395.67,3602.36) v1(3513.78,3484.25) ; U1.58 3661.97,3189.53 pad.7
NetU1_61: U1.61 U4.2 | length 1479.5
  Bottom Layer w10: U4.2 2583.39,3420 2559.06,3395.67 2559.06,3129.92 2578.74,3110.24 2765.75,3110.24 2844.49,3188.98 2862.15,3188.98 2864.98,3191.81 3146.77,3191.81 3149.61,3188.98 3165.63,3205 3275.43,3205 3319.01,3248.58 U1.61
NetU1_62: U1.62 U2.13 | length 527
  Bottom Layer w10: U2.13 3269.21,3220 3317.48,3268.27 U1.62
NetU1_64: U1.64 U2.2 | length 743.8
  Bottom Layer w10: U2.2 2973.94,3220 3001.97,3248.03 3001.97,3267.72 3031.5,3297.24 3248.03,3297.24 3258.43,3307.64 U1.64
NetU2_8: U2.8 U4.3 | length 519.7
  Bottom Layer w10: U4.3 2700.71,3370 2844.49,3513.78 3041.34,3513.78 3085.12,3470 U2.8
VCC: *2.24 *6.24 C7.2 C8.2 C9.2 C10.2 D1.2 R1.2 R2.2 R4.2 R5.2 R7.2 R9.2 R10.2 R11.2 R22.1 U1.18 U1.19 U1.26 U1.38 U1.48 U1.49 U1.54 U1.57 U2.14 U3.12 U4.14 VR1.3 | length 13621.1
  Top Layer w10: v1(2775.59,3622.05) 2780,3617.64 C9.2 ; v1(3887.8,3267.72) 3789.92,3169.84 3789.92,3129.37 3868.11,3051.18 3927.17,3051.18 ; C8.2 3934.8,3043.54 3927.17,3051.18 ; C10.2 4120,3047.17 4124.02,3051.18 ; VR1.3 5660,3494.65 5561.02,3395.67 5118.11,3395.67 4773.62,3051.18 4124.02,3051.18 ; 3927.17,3051.18 4124.02,3051.18
  Bottom Layer w10: *2.24@1291.06,1900.75 1291.06,1970.2 2303.15,2982.28 2544.06,2982.28 ; U4.14 2539.65,3470 2544.06,3474.41 ; U3.12 2510.51,4015.75 2431.1,4015.75 2391.73,3976.38 2391.73,3769.68 2544.06,3617.36 ; R5.2 3070.87,4090.47 ; D1.2@3149.02,4090.47 3070.87,4090.47 ; U1.54 3543.31,3110.79 ; U1.38 3868.11,2942.6 3868.11,3051.18 ; U1.19@4018.82,3268.27 3898.19,3268.27 3887.8,3257.87 3887.8,3130.47 U1.26 ; U1.19 U1.18 ; *6.24@5011.06,1880.75 5049.65,1919.33 5049.65,2133.9 5050,2134.25 ; C7.2@5460,2074.8 C7.2 5460,2131.65 ; R9.2 R1.2 6330.47,2955.87 6355.04,2931.31 6355.04,2581.73 6330.47,2557.17 R2.2 R11.2 R10.2 6330.47,2167.09 6309.06,2145.67 6135.2,2145.67 R7.2 R4.2 5945.64,2110.47 5921.86,2134.25 5050,2134.25 ; 2544.06,2982.28 2544.06,3474.41 ; 2544.06,2982.28 3021.65,2982.28 3029.53,2990.16 R22.1 3029.53,3021.65 3070.87,3021.65 3094.49,3045.28 U2.14 3385.12,3170 3444.33,3110.79 3543.31,3110.79 ; 2544.06,3474.41 2544.06,3617.36 ; 2544.06,3617.36 2548.74,3622.05 v1(2775.59,3622.05) 2854.33,3622.05 3070.87,3838.58 3070.87,4090.47 ; 3543.31,3110.79 3543.31,3159.45 3553.7,3169.84 U1.57 3749.45,3169.84 v1(3789.37,3129.92) v1@3790.47,3128.82 ; 3671.26,3011.81 3671.26,2942.6 U1.48 3672.36,3010.71 v1@3790.47,3128.82 ; 3671.26,3011.81 3670.71,3012.36 U1.49 3602.05,3011.81 3671.26,3011.81 ; v1@3790.47,3128.82 3868.11,3051.18 ; 3868.11,3051.18 3978.82,3051.18 3993.07,3036.93 3993.07,3005.77 4864.59,2134.25 5050,2134.25
pads on no net: *1.4 *1.5 *1.7 *1.13 *1.14 *1.15 *1.16 *6.22 J1.1 J1.2 J1.3 J1.4 J1.5 J1.7 J1.9 J1.10 J1.11 J2.1 J2.2 J2.4 J2.5 J2.6 J2.8 J2.9 J2.10 J2.11 U1.8 U1.11 U1.12 U1.13 U1.14 U1.15 U1.16 U1.17 U1.27 U1.31 U1.32 U1.33 U1.37 U1.42 U2.3 U2.4 U2.10 U2.11 U3.1 U3.2 U3.6 U3.7 U3.14 U3.15 U3.17 U4.4 U4.5 U4.6 U4.8 U4.9 U4.10 U4.11 U4.12 U4.13
copper on no net:
  other v2: 2651.61,3880.55 2612.24,3919.92 2651.61,3919.92 2690.98,3919.92 2651.61,3959.29

## Polygon pours and split planes (outlines as drawn)
GND on Bottom Layer "Bottom Layer-No Net" (solid): 1000,5000 1000,1000 7000,1000 7000,5000
GND on Top Layer "Bottom Layer-No Net" (solid): 1000,5000 1000,1000 7000,1000 7000,5000

## Text inside footprints (layer, text, board x,y; h text height)
J1: Top Overlay "1" at 5092.05,4414.06 h59.06; Top Overlay "5" at 5518.43,4414.06 h59.06; Top Overlay "9" at 5463.9,4784.13 h59.06; Top Overlay "6" at 5136.73,4784.13 h59.06
J2: Top Overlay "1" at 1992.05,4414.06 h59.06; Top Overlay "5" at 2418.43,4414.06 h59.06; Top Overlay "9" at 2363.9,4784.13 h59.06; Top Overlay "6" at 2036.73,4784.13 h59.06
P1: Top Overlay "8" at 6780,2540 h50 r270; Top Overlay "7" at 6680,2540 h50 r270; Top Overlay "1" at 6680,2980 h50 r270; Top Overlay "2" at 6780,3000 h50 r270